# Altium PCB eight-channel-ina2128-afe.PcbDoc
Units mil, origin at the board's own origin, x right, y up, seen from the top; angles counter-clockwise.
Board outline 2688.98 x 875.04 mil, 2 copper layers (Top Layer, Bottom Layer); 70 components, 51 nets, 234 pads, 88 vias.
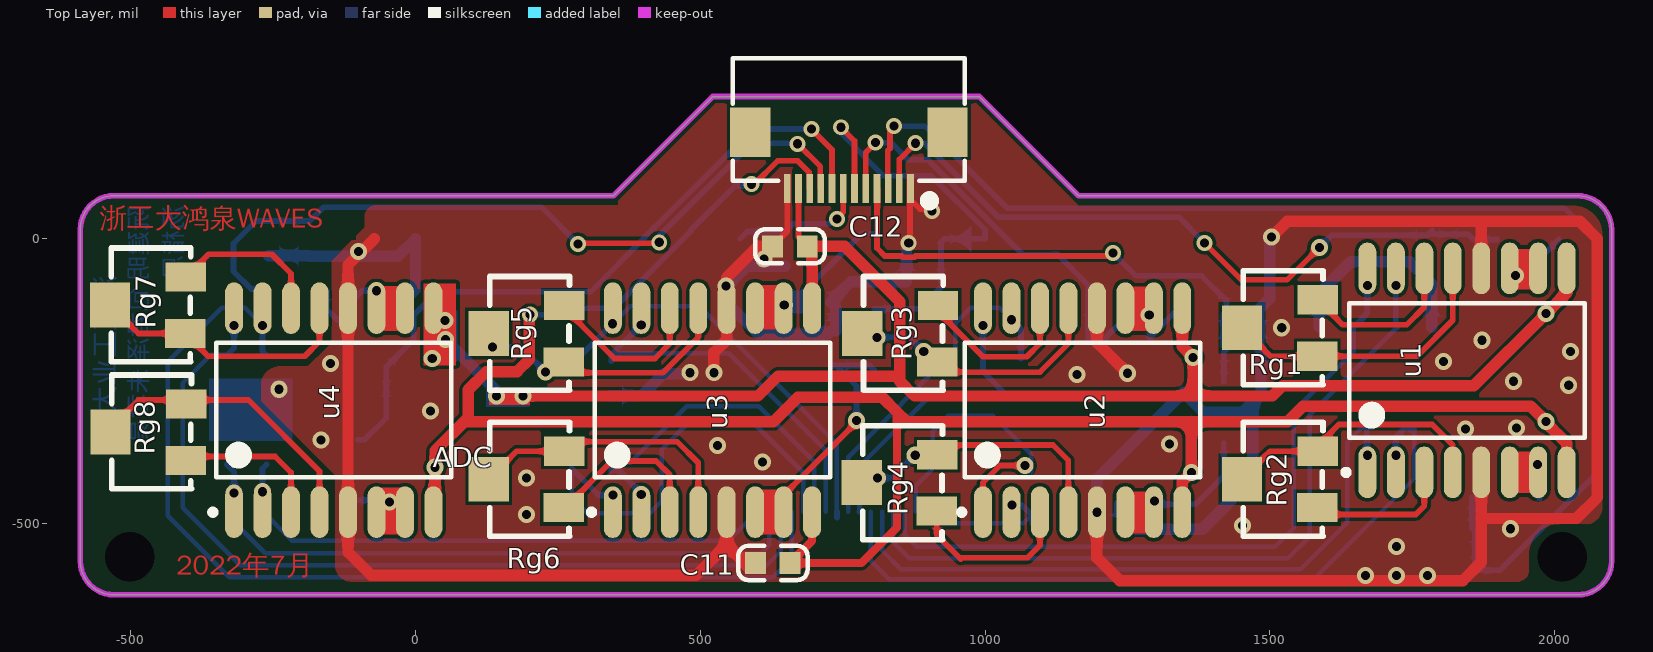
[diagram p0: Top Layer view]
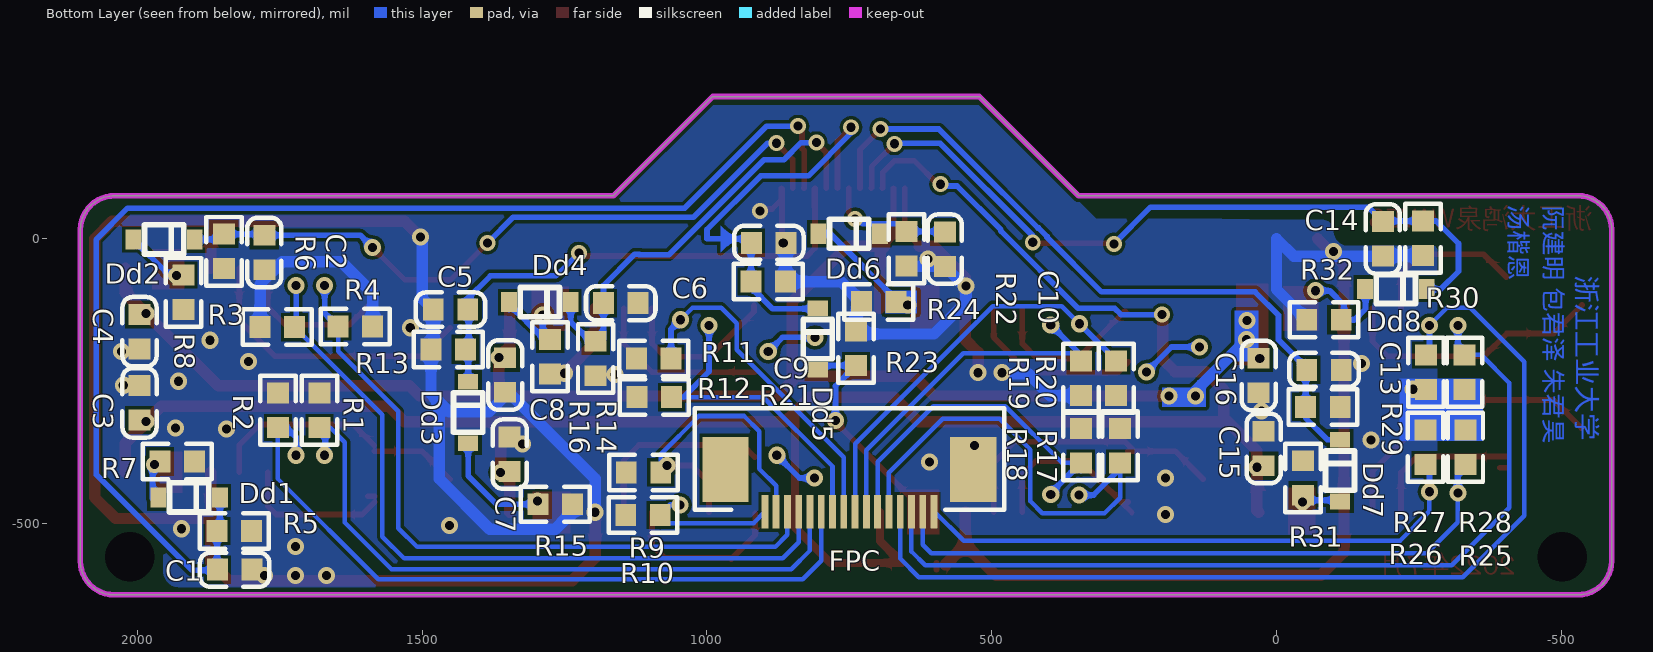
[diagram p1: Bottom Layer view, seen from below]
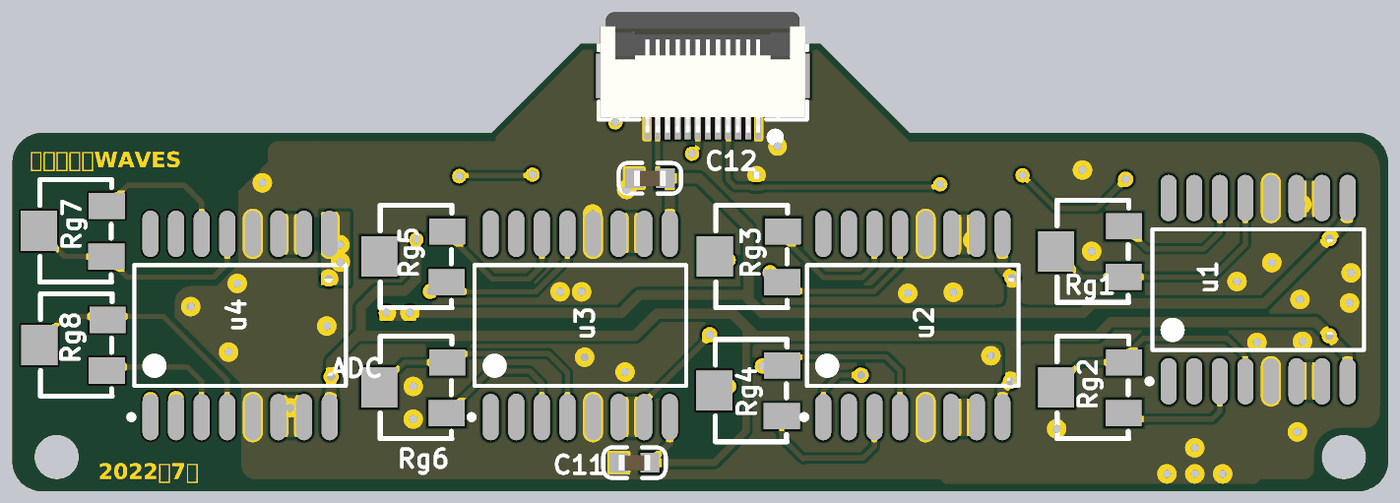
[diagram p2: 3D render of the assembled board from above, using the file's embedded part models]
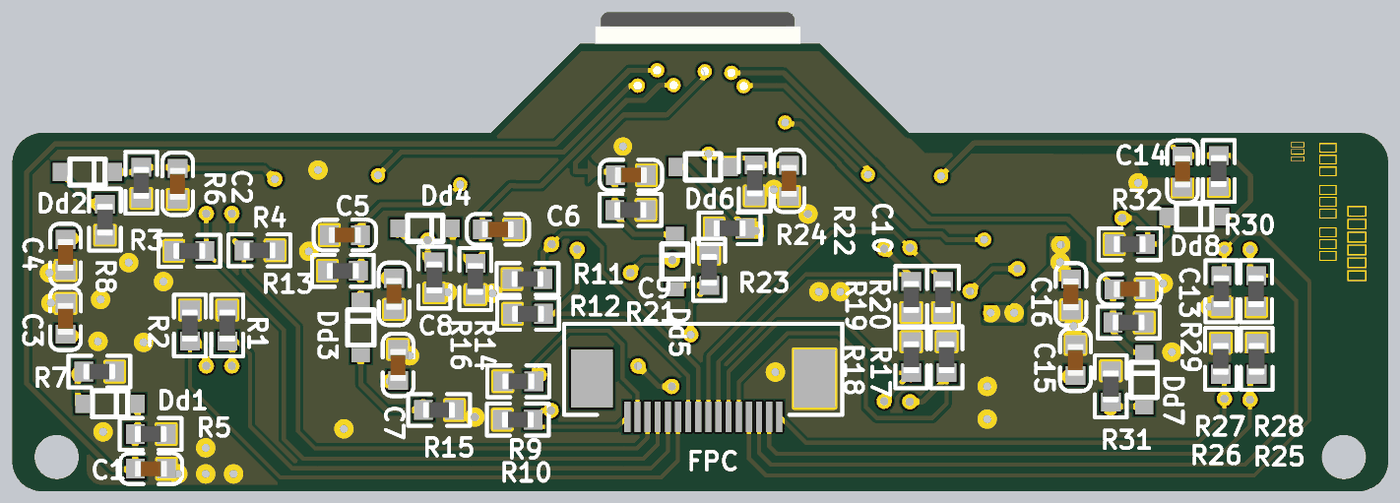
[diagram p3: 3D render of the assembled board from below, using the file's embedded part models]

## Layer stack, top to bottom
Top Solder: solder mask 0.4, Solder Resist, Dk 3.5
Top Layer: signal copper 1.4
Dielectric 1: dielectric 12.6, FR-4, Dk 4.8
Bottom Layer: signal copper 1.4
Bottom Solder: solder mask 0.4, Solder Resist, Dk 3.5

## Board outline
-588.58,-565.98 -588.58,16.69 cw(c-529.53,16.69) -529.53,75.75 347.75,75.75 522,250 990,250 1164.25,75.75 2039.42,75.75 cw(c2040.38,15.73) 2100.39,16.69 2100.39,-565.98 cw(c2041.34,-565.98) 2041.34,-625.04 -529.53,-625.04 cw(c-529.53,-565.98)

## Design rules (kind name [scope] priority, off if disabled: settings)
Clearance [All] p1: gap=6 ignorepadtopadclearanceinfootprint=TRUE
MinimumSolderMaskSliver [All] p1: minsoldermaskwidth=0
PolygonConnect [All] p1: connectstyle=Direct reliefconductorwidth=10 reliefentries=4 polygonreliefangle="90 Angle" airgapwidth=10
RoutingVias [All] p1: holewidth=16 width=28 viastyle="Through Hole" minholewidth=0 minwidth=0 maxholewidth=100 maxwidth=100
SilkToSilkClearance [All] p1 off: silktosilkclearance=0
SilkToSolderMaskClearance [IsPad] p1: minsilkscreentomaskgap=0 clearancetoexposedcopper=TRUE
SolderMaskExpansion [All] p1: expansion=4
Width [All] p1: maxlimit=50 minlimit=8 preferedwidth=10 bottomlayer_prefwidth=8 minimp=50.000000 maximp=50.000000 favimp=50.000000
27 further rules are at their usual default settings.

## Components (designator, comment, footprint, x,y, rotation, side; value= is the part's Value field where it differs from the comment)
ADC "ADC" "FPC0.5 2H-WS-12P" 761,187 r180 top
C1 "0.1uf" LC-0603_C 1827.42,-583 r90 top
C2 "0.1uf" LC-0603_C 1779.42,-26 r180 top
C3 "0.1uf" LC-0603_C 1994.42,-286 r0 top
C4 "0.1uf" LC-0603_C 1998.61,-165 r180 top
C5 "0.1uf" LC-0603_C 1452.42,-122 r270 top
C6 "0.1uf" LC-0603_C 1149.42,-115 r90 top
C7 "0.1uf" LC-0603_C 1344.42,-376 r0 top
C8 "0.1uf" LC-0603_C 1356.42,-241 r180 top
C9 "0.1uf" LC-0603_C 889.42,-9 r90 top
C10 "0.1uf" LC-0603_C 584.42,-20 r180 top
C11 "0.1uf" LC-0603_C 625.42,-567 r270 bottom
C12 "0.1uf" LC-0603_C 655.42,-11 r270 bottom
C13 "0.1uf" LC-0603_C -85.58,-232 r90 top
C14 "0.1uf" LC-0603_C -184.58,-2 r180 top
C15 "0.1uf" LC-0603_C 20.42,-366 r0 top
C16 "0.1uf" LC-0603_C 33.42,-242 r180 top
Dd1 "D Schottky" SOD-323 1909.42,-454 r0 bottom
Dd2 "D Schottky" SOD-323 1953.42,-1 r0 bottom
Dd3 "D Schottky" SOD-323 1419.42,-304.87 r270 bottom
Dd4 "D Schottky" SOD-323 1293.42,-111 r0 bottom
Dd5 "D Schottky" SOD-323 805.42,-175.87 r270 bottom
Dd6 "D Schottky" SOD-323 750.42,9 r0 bottom
Dd7 "D Schottky" SOD-323 -111.58,-407 r270 bottom
Dd8 "D Schottky" SOD-323 -209.58,-88 r0 bottom
FPC "ADC-电感" FPC_0.5_16PIN 750,-440 r0 bottom
R1 "20k" LC-0603_R 1680.42,-301 r90 bottom value=20K
R2 "20k" LC-0603_R 1753.42,-301 r90 bottom value=20K
R3 "20k" LC-0603_R 1754.42,-155 r0 bottom value=20K
R4 "20k" LC-0603_R 1617.42,-154 r180 bottom value=20K
R5 "20k" LC-0603_R 1830.06,-513 r180 bottom value=51K
R6 "20k" LC-0603_R 1848.42,-22 r270 bottom value=51K
R7 "100k" LC-0603_R 1930.42,-391 r180 bottom value=100K
R8 "100k" LC-0603_R 1919.42,-94 r90 bottom value=100K
R9 "20k" LC-0603_R 1111.42,-410 r0 bottom value=20K
R10 "20k" LC-0603_R 1112.42,-485 r0 bottom value=20K
R11 "20k" LC-0603_R 1093.42,-210 r0 bottom value=20K
R12 "20k" LC-0603_R 1092.42,-278 r0 bottom value=20K
R13 "20k" LC-0603_R 1454.42,-194 r0 bottom value=51K
R14 "20k" LC-0603_R 1195.42,-210 r270 bottom value=51K
R15 "100k" LC-0603_R 1266.42,-466 r180 bottom value=100K
R16 "100k" LC-0603_R 1275.42,-207 r90 bottom value=100K
R17 "20k" LC-0603_R 274.42,-363 r90 bottom value=20K
R18 "20k" LC-0603_R 343.42,-363 r90 bottom value=20K
R19 "20k" LC-0603_R 343.42,-245 r270 bottom value=20K
R20 "20k" LC-0603_R 281.42,-245 r270 bottom value=20K
R21 "20k" LC-0603_R 892.42,-75 r180 bottom value=51K
R22 "20k" LC-0603_R 649.42,-17.31 r270 bottom value=51K
R23 "100k" LC-0603_R 738.42,-192 r90 bottom value=100K
R24 "100k" LC-0603_R 698.42,-111 r180 bottom value=100K
R25 "20k" LC-0603_R -331.58,-366 r90 bottom value=20K
R26 "20k" LC-0603_R -261.58,-366 r90 bottom value=20K
R27 "20k" LC-0603_R -262.58,-234 r270 bottom value=20K
R28 "20k" LC-0603_R -330.58,-234 r270 bottom value=20K
R29 "20k" LC-0603_R -81.58,-295 r180 bottom value=51K
R30 "20k" LC-0603_R -257.58,1 r270 bottom value=51K
R31 "100k" LC-0603_R -46.58,-420 r90 bottom value=100K
R32 "100k" LC-0603_R -83.58,-142 r180 bottom value=100K
Rg1 "102" 精密电位器 1534.37,-161 r180 top value=1K
Rg2 "102" 精密电位器 1534.37,-427 r180 top value=1K
Rg3 "102" 精密电位器 867.48,-171 r180 top value=1K
Rg4 "102" 精密电位器 866.42,-433.07 r180 top value=1K
Rg5 "102" 精密电位器 211.42,-171 r180 top value=1K
Rg6 "102" 精密电位器 211.42,-427 r180 top value=1K
Rg7 "102" 精密电位器 -453.58,-121 r180 top value=1K
Rg8 "102" 精密电位器 -452.58,-344.04 r180 top value=1K
u1 "INA2128" INA2128 1846.42,-230.87 r90 top
u2 "INA2128" INA2128 1171.42,-300.87 r90 top
u3 "INA2128" INA2128 521.42,-300.87 r90 top
u4 "INA2128" INA2128 -143.58,-300.87 r90 top

## Footprints (in the part's own frame and the unit in brackets; to place one, negate y for a bottom-side part, rotate by r counter-clockwise, add the part's x,y. Pads: shape width x height; smd on the part's side, far side on the other; paste and mask are expansions set on the pad)
"FPC0.5 2H-WS-12P" [mm] "长：10.2mm，宽：5.2mm，高：2mm"
  rect 1.8x2.2 smd: 0(-4.4,0) 0(4.4,0)
  rect 0.3x1.3 smd: 1(-2.75,2.497) 2(-2.25,2.497) 3(-1.75,2.497) 4(-1.25,2.497) 5(-0.75,2.497) 6(-0.25,2.497) 7(0.25,2.497) 8(0.75,2.497) 9(1.25,2.497) 10(1.75,2.497) 11(2.25,2.497) 12(2.75,2.497)
  silkscreen extent -5.18,-3.3 5.18,3.23, body extent -5.1,-3.15 5.1,2.85, height 2
FPC_0.5_16PIN [mm]
  rect 0.305x1.5 smd: 1(-3.775,1) 2(-3.272,1) 3(-2.769,1) 4(-2.266,1) 5(-1.763,1) 6(-1.26,1) 7(-0.757,1) 8(-0.254,1) 9(0.248,1) 10(0.751,1) 11(1.254,1) 12(1.757,1) 13(2.26,1) 14(2.763,1) 15(3.266,1) 16(3.769,1)
  rect 2.054x2.9 smd: 17(-5.526,-0.9) 18(5.526,-0.9)
  silkscreen extent -6.9,-3.62 6.9,0.9
INA2128 [mm]
  oval 2.3x0.8 smd: 1(-4.55,4.445) 2(-4.55,3.175) 3(-4.55,1.905) 4(-4.55,0.635) 5(-4.55,-0.635) 6(-4.55,-1.905) 7(-4.55,-3.175) 8(-4.55,-4.445) 9(4.55,-4.445) 10(4.55,-3.175) 11(4.55,-1.905) 12(4.55,-0.635) 13(4.55,0.635) 14(4.55,1.905) 15(4.55,3.175) 16(4.55,4.445)
  silkscreen extent -4.67,-5.25 3,5.52, body extent -3.8,-5.25 3.8,5.25, height 2.65
LC-0603_C [mm]
  rect 0.98x0.93 smd far side: 1(0.053,0.719) 2(0.053,-0.821)
  body extent -0.35,-0.85 0.45,0.75, height 0.6
LC-0603_R [mm]
  rect 0.93x0.98 smd: 1(-0.77,0) 2(0.77,0)
  silkscreen extent -1.53,-0.79 1.54,0.79, body extent -0.8,-0.4 0.8,0.4, height 0.38
SOD-323 [mm] "SS14-SOD323"
  rect 0.7x0.9 smd: 1(1.375,0) 2(-1.375,0)
  silkscreen extent -0.87,-0.65 0.87,0.65
精密电位器 [mm]
  rect 1.8x1.3 smd: 1(-1.243,1.143) 3(-1.268,-1.372)
  rect 1.8x2 smd: 2(2.107,-0.127)
  silkscreen extent -1.5,-2.67 2.06,2.41

## Part data
C1 C2 C3 C4 C5 C6 C7 C8 C9 C10 C11 C12 C13 C14 C15 C16: library part Cap
Dd1 Dd2 Dd3 Dd4 Dd5 Dd6 Dd7 Dd8: "Schottky Diode", Code_JEDEC=DO-214-AA, LatestRevisionDate=17-Jul-2002, LatestRevisionNote="Re-released for DXP Platform.", PackageDescription="DO-214-AA/SMB; 2 C-Bend Leads; Body 5.3 x 3.6 mm, inc. leads (LxW)", PackageReference=SMB, Published=8-Jun-2000, Publisher="Altium Limited"
R1 R2 R3 R4 R5 R6 R7 R8 R9 R10 R11 R12 R13 R14 R15 R16 R17 R18 R19 R20 R21 R22 R23 R24 R25 R26 R27 R28 R29 R30 R31 R32: library part Res, "Resistor", LatestRevisionDate=17-Jul-2002, LatestRevisionNote="Re-released for DXP Platform.", PackageReference=AXIAL-0.4, Published=8-Jun-2000, Publisher="Altium Limited"
Rg1 Rg2 Rg3 Rg4 Rg5 Rg6 Rg7 Rg8: library part RPot, "Potentiometer", LatestRevisionDate=17-Jul-2002, LatestRevisionNote="Re-released for DXP Platform.", PackageReference=VR5, Published=8-Jun-2000, Publisher="Altium Limited", Set Position=0.5, Sim Note="Enter the Resistance value and the set point into parameter fields."

## Free pads (board coordinates)
  round 0 hole 86.61 unplated: 2(-501.97,-558.11) 2(2013.78,-558.11)

## Via types
v1: diameter 30, hole 16, Top Layer to Bottom Layer, 73 vias
v2: diameter 28, hole 16, Top Layer to Bottom Layer, 15 vias

## Nets (pads, with @x,y where several pads share a name; then routed paths per layer and width w, separated by ;. In a path a pad name is that pad's centre, name@x,y a point inside that pad or via, vN(x,y) a via of type N, cw(c..) or ccw(c..) an arc to the next point about the centre after c; other vN are vias at no path point)
+Vcheck: ADC.11 C4.2 C8.2 C12.2 C16.2 u1.9 u2.9 u3.9 u4.9 | length 2933.1
  Top Layer w10: ADC.11 672.42,3.21 687.74,-12.11 C12.2
  Top Layer w20: u4.9 u4.9@39.68,-121.73 ; v1(142.42,-276) v1(188.42,-276) 601.42,-276 636.42,-241 850.42,-241 850.42,-250 876.42,-276 1365.42,-276 ; u3.9 696.42,-46.46 696.05,-46.09 696.05,-21.4 C12.2 753.51,-13.1 850.42,-110 850.42,-238 ; u2.9 1346.42,-189 v1(1365.42,-208) 1365.42,-276 ; u1.9 2021.42,-95 v1(1985.42,-131) 1858.42,-258 1522.42,-258 1504.42,-276 1365.42,-276
  Bottom Layer w20: v1(52.42,-177) v1@153.42,-278 ; v1(142.42,-276) v1@153.42,-278 ; v1@179.42,-278 v1@153.42,-278
  other v1: 29.42,-210 51.42,-143
-Vcheck: ADC.10 C3.2 C7.2 C11.2 C15.2 u1.8 u2.8 u3.8 u4.8 | length 3835.5
  Top Layer w10: v2(590,96) 594.87,96 635.87,137 671.16,137 691.2,116.97 691.2,89.6 ADC.10
  Top Layer w14: u3.8 696.42,-530.42 C11.2 783.32,-569.1 845.42,-507 845.42,-304
  Top Layer w20: u4.8 34.42,-477 v1(34.42,-401) 34.42,-372 92.42,-314 ; v2@200,-136 200,-211.42 178.42,-233 124.42,-233 92.42,-265 92.42,-314 ; u2.8 1346.42,-426 v1(1362.42,-410) 1362.42,-321 ; u1.8 2021.42,-359 1984.42,-322 v1(1985.42,-321) 1958.42,-294 1558.42,-294 1531.42,-321 1362.42,-321 ; 92.42,-314 92.42,-321 628.42,-321 671.42,-278 819.42,-278 845.42,-304 862.42,-321 1362.42,-321
  Bottom Layer w10: v2(201,-133) 273,-133 284,-122 348,-122 484,14 484,16 561,93 587,93 v2(590,96)
ADC1: ADC.2 C2.2 Dd2.2 R6.1 | length 1260.6
  Top Layer w10: ADC.2 849.58,139.58 v2(878,168) ; v2(1385.71,-7.29) 1450.42,-72 1530.42,-72 v1(1587.42,-15)
  Bottom Layer w10: v2(878,168) 893.63,168 1023.63,38 1340.42,38 v2(1385.71,-7.29) ; v1(1587.42,-15) 1608.74,6.32 1776.74,6.32 C2.2@1785.42,15 ; C2.2 1779.31,8.31 R6.1 1857.73,-1 Dd2.2
ADC2: ADC.3 C1.2 Dd1.2 R5.1 | length 2246.6
  Top Layer w10: ADC.3 828.99,89.6 828.99,154.64 833,158.64 833,191 v2(840,198)
  Bottom Layer w10: v2(840,198) 895,198 1039,54 2017.42,54 2072.42,-1 2072.42,-414 1904.51,-581.9 C1.2@1866.74,-581.9 ; Dd1.2 1855.28,-507.91 R5.1 1860.37,-580.27 C1.2
ADC3: ADC.4 C5.2 Dd3.2 R13.1 | length 980.8
  Top Layer w10: 810.21,54.95 ADC.4 ; 811.12,54.95 811.12,87.79 ADC.4 ; v2(1225,-25) 1220,-30 878.36,-30 876.36,-32 855.64,-32 853.64,-30 824,-30 810.21,-16.21 ADC.4
  Bottom Layer w10: v2(1225,-25) 1265,-65 1380.42,-65 1424.19,-108.77 C5.2@1424.19,-126 ; Dd3.2 1419.42,-198.69 R13.1 1418.42,-188.31 1418.42,-131.77 C5.2@1424.19,-126 ; C5.2@1425.09,-125.1 C5.2@1424.19,-126
ADC4: ADC.5 C6.2 Dd4.2 R14.1 | length 757.2
  Top Layer w10: ADC.5 790.53,151.53 v2(808,169)
  Bottom Layer w10: v2(808,169) 835,169 865,139 900,139 1067,-28 1119,-28 ; 1118.41,-27.12 1127.12,-27.12 1181.74,-81.74 C6.2 R14.1@1181.74,-176.01 ; R14.1@1195.42,-189.69 1239.28,-145.82 Dd4.2
ADC5: ADC.6 C9.2 Dd5.2 R21.1 | length 749.6
  Top Layer w10: v2(747,196) 770.84,172.16 ADC.6
  Bottom Layer w10: v2(747,196) 747,185.64 821.96,110.69 905.69,110.69 1000,16.37 1000,0 928.64,0 C9.2 922.73,-7.89 R21.1 ; Dd5.2@805.42,-122.73 885,-122.73 R21.1@922.73,-85
ADC6: ADC.7 C10.2 Dd6.2 R22.1 | length 242.5
  Top Layer w10: v2@739.5,35.5 751.16,47.16 ADC.7
  Bottom Layer w10: C10.2@570,0 C10.2 583,13 R22.1 662.72,26.31 726.44,26.31 735.13,35 v2(740,35)
ADC7: ADC.8 C13.2 Dd7.2 R29.1 | length 1220.8
  Top Layer w10: v2(695,193) 731.47,156.53 ADC.8
  Bottom Layer w10: Dd7.2@-101.58,-352.87 -89.45,-352.87 -51.27,-314.69 R29.1 -51.27,-224.69 -3.58,-177 -3.58,-134 37.42,-93 307,-93 403,3 403,4.36 417.64,19 419,19 538.69,138.69 593,193 v2(695,193)
ADC8: ADC.9 C14.2 Dd8.2 R30.1 | length 1348.2
  Top Layer w10: v2(285,-9) 286.5,-7.5 426.5,-7.5 v2(428,-6) ; v2(671,167) 710.88,127.12 710.88,89.6 ADC.9
  Bottom Layer w10: Dd8.2@-263.72,-98 Dd8.2 -288.58,-88 -319.58,-57 -319.58,-8 -280.27,31.31 R30.1 -187.67,31.31 C14.2 -161.25,55.75 221.25,55.75 v2@285.5,-8.5 ; v2(428,-6) 428,5.37 590.63,168 659,168 660,167 v2(671,167)
JC1: FPC.12 R1.1 u1.1 | length 1177.3
  Bottom Layer w8: FPC.12 819.18,-547.18 852,-580 1554,-580 1636,-498 1636,-357 1661.69,-331.31 1670.42,-331.31 R1.1
  Bottom Layer w10: R1.1@1670.42,-331.31 1670.42,-379 v1(1671.42,-380)
JC2: FPC.11 R2.1 u1.2 | length 1292.1
  Bottom Layer w8: FPC.11 799.38,-565.38 832,-598 1577,-598 1753.42,-421.58 1753.42,-336.31 R2.1
  Bottom Layer w10: v1(1721.42,-380) 1721.42,-348 1740.76,-328.66 1748.42,-336.31 R2.1@1753.42,-336.31
JC3: FPC.13 R3.1 u1.15 | length 1317.9
  Bottom Layer w8: FPC.13 838.98,-532.98 867,-561 1532,-561 1570,-523 1570,-309.1 R3.1
  Bottom Layer w10: v1(1721.42,-82) 1721.42,-152.31 R3.1
JC4: FPC.14 R4.1 u1.16 | length 1225.7
  Bottom Layer w8: FPC.14 858.78,-519.78 880,-541 1509,-541 1542,-508 1542,-303 1647.73,-197.27 R4.1
  Bottom Layer w10: R4.1 1671.42,-130.31 v1(1671.42,-82)
JC5: FPC.15 R9.1 u2.1 | length 536
  Top Layer w10: u2.1 996.42,-428 1026.42,-398 v1(1070.42,-398)
  Bottom Layer w8: FPC.15 878.58,-433.42 908,-404 908,-338 935,-311 1014,-311 1081.1,-378.1 R9.1
JC6: FPC.16 R10.1 u2.2 | length 255.3
  Bottom Layer w8: FPC.16 918.01,-499 1068.1,-499 R10.1 R10.1@1082.1,-500.49
  Bottom Layer w10: v1(1047.42,-467) 1064.1,-467 R10.1
JC7: FPC.9 R11.1 u2.15 | length 602.5
  Bottom Layer w8: FPC.9 759.78,-383.22 948,-195 948,-148 975,-121 1025.42,-121 v1(1046.42,-142)
  Bottom Layer w10: v1(1046.42,-142) 1063.1,-158.69 R11.1
JC8: FPC.10 R12.1 u2.16 | length 557.6
  Bottom Layer w8: FPC.10 779.58,-399.42 901,-278 1041.42,-278 R12.1
  Bottom Layer w10: FPC.10@779.42,-479.21 FPC.10 ; v1(996.42,-152) 996.42,-233 1041.42,-278
JC9: FPC.5 R17.1 u3.1 | length 800.1
  Bottom Layer w8: R17.1 274.42,-403.31 274.42,-454.42 302,-482 411,-482 432,-461 432,-370 486,-316 586,-316 680.58,-410.58 FPC.5
  Bottom Layer w10: R17.1@274.42,-403.31 321.1,-450 v1(346.42,-450)
JC10: FPC.6 R18.1 u3.2 | length 617.8
  Bottom Layer w8: R18.1 376.69,-393.31 476,-294 603,-294 700.38,-391.38 FPC.6
  Bottom Layer w10: R18.1 343.42,-407 350.26,-400.16 396.42,-446.31 v1(396.42,-449)
JC11: FPC.7 R19.1 u3.15 | length 646.8
  Bottom Layer w8: R19.1 357.1,-201 550,-201 720.18,-371.18 FPC.7
  Bottom Layer w10: R19.1 343.42,-204 v1(396.42,-151)
JC12: FPC.8 R20.1 u3.16 | length 740.1
  Bottom Layer w8: v1(346,-149) 377,-118 498,-118 739.98,-359.98 FPC.8
  Bottom Layer w10: R20.1@274.42,-214.69 277.92,-211.19 R20.1@282.81,-211.19 ; R20.1@274.42,-204.69 R20.1@275.42,-203.69 ; R20.1 281.42,-213.58 v1(346,-149) ; FPC.8@739.98,-489.37 FPC.8
JC13: FPC.2 R25.1 u4.1 | length 1132.6
  Bottom Layer w8: v1(-318.58,-446) -318.58,-497.42 -264,-552 606,-552 621.18,-536.82 FPC.2
  Bottom Layer w10: R25.1 -318.58,-409.31 v1(-318.58,-446)
JC14: FPC.1 R26.1 u4.2 | length 996.5
  Bottom Layer w8: v1(-268.58,-444) -268.58,-478.42 -217,-530 549.42,-530 FPC.1@600.42,-479
  Bottom Layer w10: v1(-268.58,-444) -268.58,-403.31 R26.1
JC15: FPC.4 R27.1 u4.15 | length 1778.6
  Bottom Layer w8: v1(-268.58,-152) -299.58,-121 -340,-121 -434.81,-215.81 -434.81,-486.19 -327,-594 628,-594 660.78,-561.22 FPC.4
  Bottom Layer w10: v1(-268.58,-152) -268.58,-197.69 R27.1
JC16: FPC.3 R28.1 u4.16 | length 1545.9
  Bottom Layer w8: R28.1 -359.69,-203.69 -409,-253 -409,-472 -308,-573 617,-573 640.98,-549.02 FPC.3
  Bottom Layer w10: R28.1 -318.58,-191.69 v1(-318.58,-152)
NetRg1_1: Rg1.1 Rg1.2 u1.13 | length 508.1
  Top Layer w10: Rg1.2 1501.42,-206 Rg1.1 1758.42,-206 1821.42,-143 u1.13
NetRg1_3: Rg1.3 u1.14 | length 286.5
  Top Layer w10: Rg1.3 1628.29,-151 1740.42,-151 1771.42,-120 u1.14
NetRg2_1: Rg2.1 u1.3 | length 274.5
  Top Layer w10: Rg2.1@1583.31,-462 1605.31,-484 1756.42,-484 1771.42,-469 u1.3 ; Rg2.1@1583.31,-452 Rg2.1@1595.42,-452
NetRg2_2: Rg2.2 Rg2.3 u1.4 | length 468.5
  Top Layer w10: Rg2.2 1500.42,-373 Rg2.3 ; Rg2.3@1584.29,-363 1621.29,-326 1785.42,-326 1821.42,-362 u1.4
NetRg3_1: Rg3.1 Rg3.2 u2.13 | length 405.3
  Top Layer w10: Rg3.1@916.42,-234 1096.42,-234 1146.42,-184 u2.13
  Bottom Layer w10: v1(810.42,-173) 867.42,-173 v1(892.42,-198)
NetRg3_3: Rg3.3 u2.14 | length 294.5
  Top Layer w10: Rg3.3 917.4,-127.98 996.42,-207 1073.42,-207 1096.42,-184 u2.14
NetRg4_1: Rg4.1 u2.3 | length 304.4
  Top Layer w10: Rg4.1@915.35,-482 915.35,-519.94 957.42,-562 959.42,-560 1074.42,-560 1096.42,-538 u2.3
NetRg4_2: Rg4.2 Rg4.3 u2.4 | length 423.5
  Top Layer w10: Rg4.3@916.34,-383 937.34,-362 1119.42,-362 1146.42,-389 u2.4
  Bottom Layer w10: v1(811.42,-420) 837.42,-420 v1(877.42,-380)
NetRg5_1: Rg5.1 Rg5.2 u3.13 | length 432.1
  Top Layer w10: Rg5.1 279.35,-235 434.42,-235 496.42,-173 u3.13
  Bottom Layer w10: v1(135.42,-190) 184.42,-190 v1(228.42,-234)
NetRg5_3: Rg5.3 u3.14 | length 306.9
  Top Layer w10: u3.14 446.42,-184 420.42,-210 349.42,-210 Rg5.3@271.42,-132 ; Rg5.3@268.42,-132 268.42,-131 Rg5.3@269.42,-130 ; Rg5.3@268.42,-132 261.42,-132 266.42,-127 Rg5.3@269.42,-130 ; Rg5.3@268.42,-132 Rg5.3@271.42,-132 ; Rg5.3@269.42,-130 Rg5.3@271.42,-132
NetRg6_1: Rg6.1 u3.3 | length 319
  Top Layer w10: Rg6.1@253.92,-480.5 Rg6.1@272.42,-462 ; Rg6.1@260.35,-462 Rg6.1@272.42,-462 ; Rg6.1@273.42,-462 Rg6.1@272.42,-462 ; u3.3 446.42,-414 422.42,-390 344.42,-390 Rg6.1@272.42,-462
NetRg6_2: Rg6.2 Rg6.3 u3.4 | length 505.3
  Top Layer w10: Rg6.2 177.46,-373 Rg6.3 ; Rg6.3@252.42,-370 266.42,-356 459.42,-356 496.42,-393 u3.4
NetRg7_1: Rg7.1 Rg7.2 u4.13 | length 474.3
  Top Layer w10: Rg7.2 -486.54,-166 Rg7.1 -364.65,-206 -194.58,-206 -168.58,-180 u4.13
NetRg7_3: Rg7.3 u4.14 | length 276.5
  Top Layer w10: Rg7.3 -363.66,-27 -252.58,-27 -218.58,-61 u4.14
NetRg8_1: Rg8.1 u4.3 | length 277.6
  Top Layer w10: Rg8.1@-403.57,-402 Rg8.1@-392.58,-402 ; Rg8.1@-403.57,-382 -246.58,-382 -218.58,-410 u4.3
NetRg8_2: Rg8.2 Rg8.3 u4.4 | length 510.9
  Top Layer w10: Rg8.2@-535.46,-332 -486.46,-283 -293.58,-283 -168.58,-408 u4.4
S1: Dd1.1 R7.1 u1.6 u1.7 | length 67.3
  Bottom Layer w10: R7.1@1960.73,-394 1973.55,-406.82 Dd1.1@1973.55,-456
  other v1: 1970.42,-396
S2: Dd2.1 R8.2 u1.10 u1.11 | length 114.1
  Bottom Layer w10: R8.2 1944.87,-63.68 Dd2.1
  other v1: 1931.42,-64
S3: Dd3.1 R15.1 u2.6 u2.7 | length 200.4
  Bottom Layer w10: R15.1 1369.42,-466 1419.42,-416 Dd3.1
  other v1: 1297.42,-460
S4: Dd4.1 R16.2 u2.10 u2.11 | length 126.9
  Bottom Layer w10: v1(1288.42,-134) 1288.42,-173.68 Dd4.1@1347.55,-114.55 ; Dd4.1@1347.55,-124.55 Dd4.1@1347.55,-121
S5: Dd5.1 R23.1 u3.6 u3.7 | length 437.2
  Top Layer w10: u3.6 616.42,-480 774.42,-322 v1(774.42,-319)
  Bottom Layer w10: R23.1@729.42,-222.31 R23.1 ; v1(774.42,-319) 774.42,-258.31 R23.1 ; Dd5.1 797.73,-222.31 R23.1
S6: Dd6.1 R24.2 u3.10 u3.11 | length 208.9
  Bottom Layer w10: v1(647.42,-116) 658.42,-116 783.42,9 Dd6.1
S7: Dd7.1 R31.1 u4.6 u4.7 | length 60.7
  Bottom Layer w10: Dd7.1@-103.72,-459 -55.27,-459 R31.1
  other v1: -45.58,-462
S8: Dd8.1 R32.2 u4.10 u4.11 | length 171.8
  Bottom Layer w10: Dd8.1@-156.45,-90 -156.45,-123.13 -137.58,-142 R32.2 -118.58,-137.32 -118.58,-116 -93.58,-91 v1(-68.58,-91)
VSSA: ADC.1 ADC.12 C1.1 C2.1 C3.1 C4.1 C5.1 C6.1 C7.1 C8.1 C9.1 C10.1 C11.1 C12.1 C13.1 C14.1 C15.1 C16.1 FPC.17 R1.2 R2.2 R3.2 R4.2 R5.2 R6.2 R7.2 R8.1 R9.2 R10.2 R11.2 R12.2 R13.2 R14.2 R15.2 R16.1 R17.2 R18.2 R19.2 R20.2 R21.2 R22.2 R23.2 R24.1 R25.2 R26.2 R27.2 R28.2 R29.2 R30.2 R31.2 R32.1 u1.5 u1.12 u2.5 u2.12 u3.5 u3.12 u4.5 u4.12 | length 7118.1
  Top Layer w10: C11.1@597.11,-580.69 C11.1 ; C12.1 627.11,-12.11 652.73,13.51 ADC.12 ; v2(866,-7) 868.36,-4.64 ADC.1@868.36,87.79 ; ADC.1@868.36,69.01 ADC.1@868.36,87.79 ; v2(907,49) 903.56,52.44 885.83,52.44 869.27,69.01 ADC.1 ADC.1@868.36,87.79
  Top Layer w20: -72.58,0 -118.58,-46 u4.12 u4.5 -118.58,-550 -77.58,-591 492.42,-591 546.42,-537 ; v1(524,-235) 524,-199.42 546.42,-177 u3.12 546.42,-68 601.32,-13.1 C12.1 ; u3.5 546.42,-537 ; C11.1@581.51,-572.1 546.42,-537 ; v1(1196.42,-480) 1196.42,-560 1236.46,-600.04 1839.38,-600.04 1871.42,-568 1871.42,-491 ; u2.12 1196.42,-182 v1@1246.42,-232 ; v1(1503,3) 1531,31 1871.42,31 u1.12 ; u1.5 1871.42,-491 ; 1875.42,31 2044.42,31 2075.39,0.02 2075.39,-454.02 2038.42,-491 1871.42,-491
  Bottom Layer w20: R30.2 -187.67,-29.32 C14.1 -30.31,-30.31 0,0 0,-88.73 R32.1 ; R19.2 397.1,-275.32 435.42,-237 v1@474.42,-237 ; R22.2 648.74,-48.31 C10.1 547.63,-83 v1(545.42,-83) 545.42,-111 601.42,-167 724.1,-167 R23.2@729.42,-161.68 ; R23.2 738.42,-120.69 R24.1 764.73,-75 R21.2 C9.1@862.1,-7.89 ; v1(1196.42,-480) 1196.42,-421.21 1348.32,-269.31 1383.01,-304 1452.42,-304 1470.42,-286 ; R15.2 1236.1,-479.68 1266.42,-510 1381.42,-510 1470.42,-421 1470.42,-286 ; v1@1500,0 1500,-104.82 C5.1 1480.72,-189.99 R13.2 1484.73,-271.68 1470.42,-286 ; R4.2 1587.1,-95.32 1642.1,-40.32 1745.73,-40.32 1784.73,-79.32 R3.2
  other v1: 1668,-591 1722.5,-591 1777,-591 1722.5,-540 1923,-509 1452.42,-503 195,-484 195,-420 609,-392 530,-363 1324,-360 -166,-353 1844,-334 1933,-332 26,-302 -240,-264 2025,-257 1928,-250 1161.42,-238 1250.42,-236 482,-235 -149.02,-218.67 1805,-215 2028,-198 1873,-178 1521,-156 612,-35 -100,-22
pads on no net: ADC.0 FPC.18

## Polygon pours and split planes (outlines as drawn)
VSSA on Top Layer "Top Layer-No Net 2" (solid, remove dead copper, pour order 7): -140,-175 -206,-241 -111,-241 -100,-252
VSSA on Top Layer "Top Layer-No Net 2" (solid, remove dead copper, pour order 1): 1164.24,58.42 984.66,238 527,238 356,67 356,58.81 -28.99,59 -70,59 ccw(c-70,40) -89,40 -89,20 -147,-38 -147,-212 cw(c-159,-212) -159,-224 -239,-224 ccw(c-239,-256) -271,-256 -271,-285 -141,-415 -141,-573 ccw(c-112,-573) -112,-602 1934,-602 ccw(c1934,-581) 1955,-581 1955,-554 cw(c2008,-554) 2008,-501 2055,-501 ccw(c2055,-472) 2084,-472 2084,7 ccw(c2033,7) 2033.02,58
VSSA on Bottom Layer "Top Layer-No Net 2" (solid, remove dead copper, pour order 5): 1170.16,47.22 1170.16,54.84 990,235 516,235 317,36 96.01,35.09 -1,34 -79,34 ccw(c-79,13) -100,13 cw(c-125.13,13) -125.13,-12.13 -274.13,-12.13 ccw(c-274.13,-20) -282,-20 -282,-590 ccw(c-260,-590) -260,-612 1926,-612 ccw(c1926,-583) 1955,-583 1955,-552 cw(c2004,-552) 2004,-503 2058,-503 ccw(c2058,-476) 2085,-476 2085,9 ccw(c2037,9) 2037,57

## Keep-outs
Keep-Out Layer:
  lines w10: 2039.42,75.75 cw(c2040.38,15.73) 2100.39,16.69 2100.39,-565.98 cw(c2041.34,-565.98) 2041.34,-625.04 -529.53,-625.04 cw(c-529.53,-565.98) -588.58,-565.98 -588.58,16.69 cw(c-529.53,16.69) -529.53,75.75 347.75,75.75 522,250 990,250 1164.25,75.75 2041.34,75.75

## Other copper
Top Layer:
  region net S2: 1974.42,-89 1974.42,-18 1917.42,-18 1917.42,-89
  region net S1: 1970.42,-446 1970.42,-373 1921.42,-373 1921.42,-446
  region net S4: 1308.42,-162 1308.42,-84 1242.42,-84 1242.42,-162
  region net +Vcheck: 201.42,-292 201.42,-262 129.42,-262 129.42,-292
  region net +Vcheck: 71.42,-222 71.42,-78 14.42,-78 14.42,-222
  region net S8: -11.58,-162 -11.58,-83 -73.58,-83 -73.58,-162
  region net S7: -20.58,-519 -20.58,-437 -68.58,-437 -68.58,-519
  region net S5: 648.42,-519 648.42,-440 591.42,-440 591.42,-519
  region net S6: 643.42,-159 643.42,-81 591.42,-81 591.42,-159
  region net S3: 1306.42,-517 1306.42,-444 1239.42,-444 1239.42,-517
  text "浙工大鸿泉WAVES" at -554.58,8.56 h60
  text "2022年7月" at -420.58,-601 h60
Bottom Layer:
  region net VSSA: -216,-355 -216,-245 -363,-245 -363,-355
  region net +Vcheck: 201.42,-295 201.42,-261 123.42,-261 123.42,-295
  region net +Vcheck: 73.42,-215 73.42,-126 31.42,-126 31.42,-215
  region net S6: 687.42,-131 687.42,-91 631.42,-91 631.42,-131
  text "汤楷恩" at -399,59 h55 r90
  text "阮建明 包君泽 朱君昊" at -461,58 h55 r90
  text "浙江工业大学" at -516.58,-65.04 h60 r90

## Silkscreen, mask and mechanical layers (free items; w line width, h text height)
Top Solder:
  text "浙工大鸿泉WAVES" at -554.58,8.56 h60
  text "2022年7月" at -420.58,-601 h60
Bottom Solder:
  text "汤楷恩" at -399,59 h55 r90
  text "阮建明 包君泽 朱君昊" at -461,58 h55 r90
  text "浙江工业大学" at -516.58,-65.04 h60 r90